# Altium PCB sensornode_v2.PcbDoc (part 2 of 2)
Units mm, origin at the board's own origin, x right, y up, seen from the top; angles counter-clockwise.
Board outline 61 x 65.5 mm, 2 copper layers (Top Layer, Bottom Layer), stack 1.6 mm thick; 116 components, 100 nets, 458 pads, 193 vias.
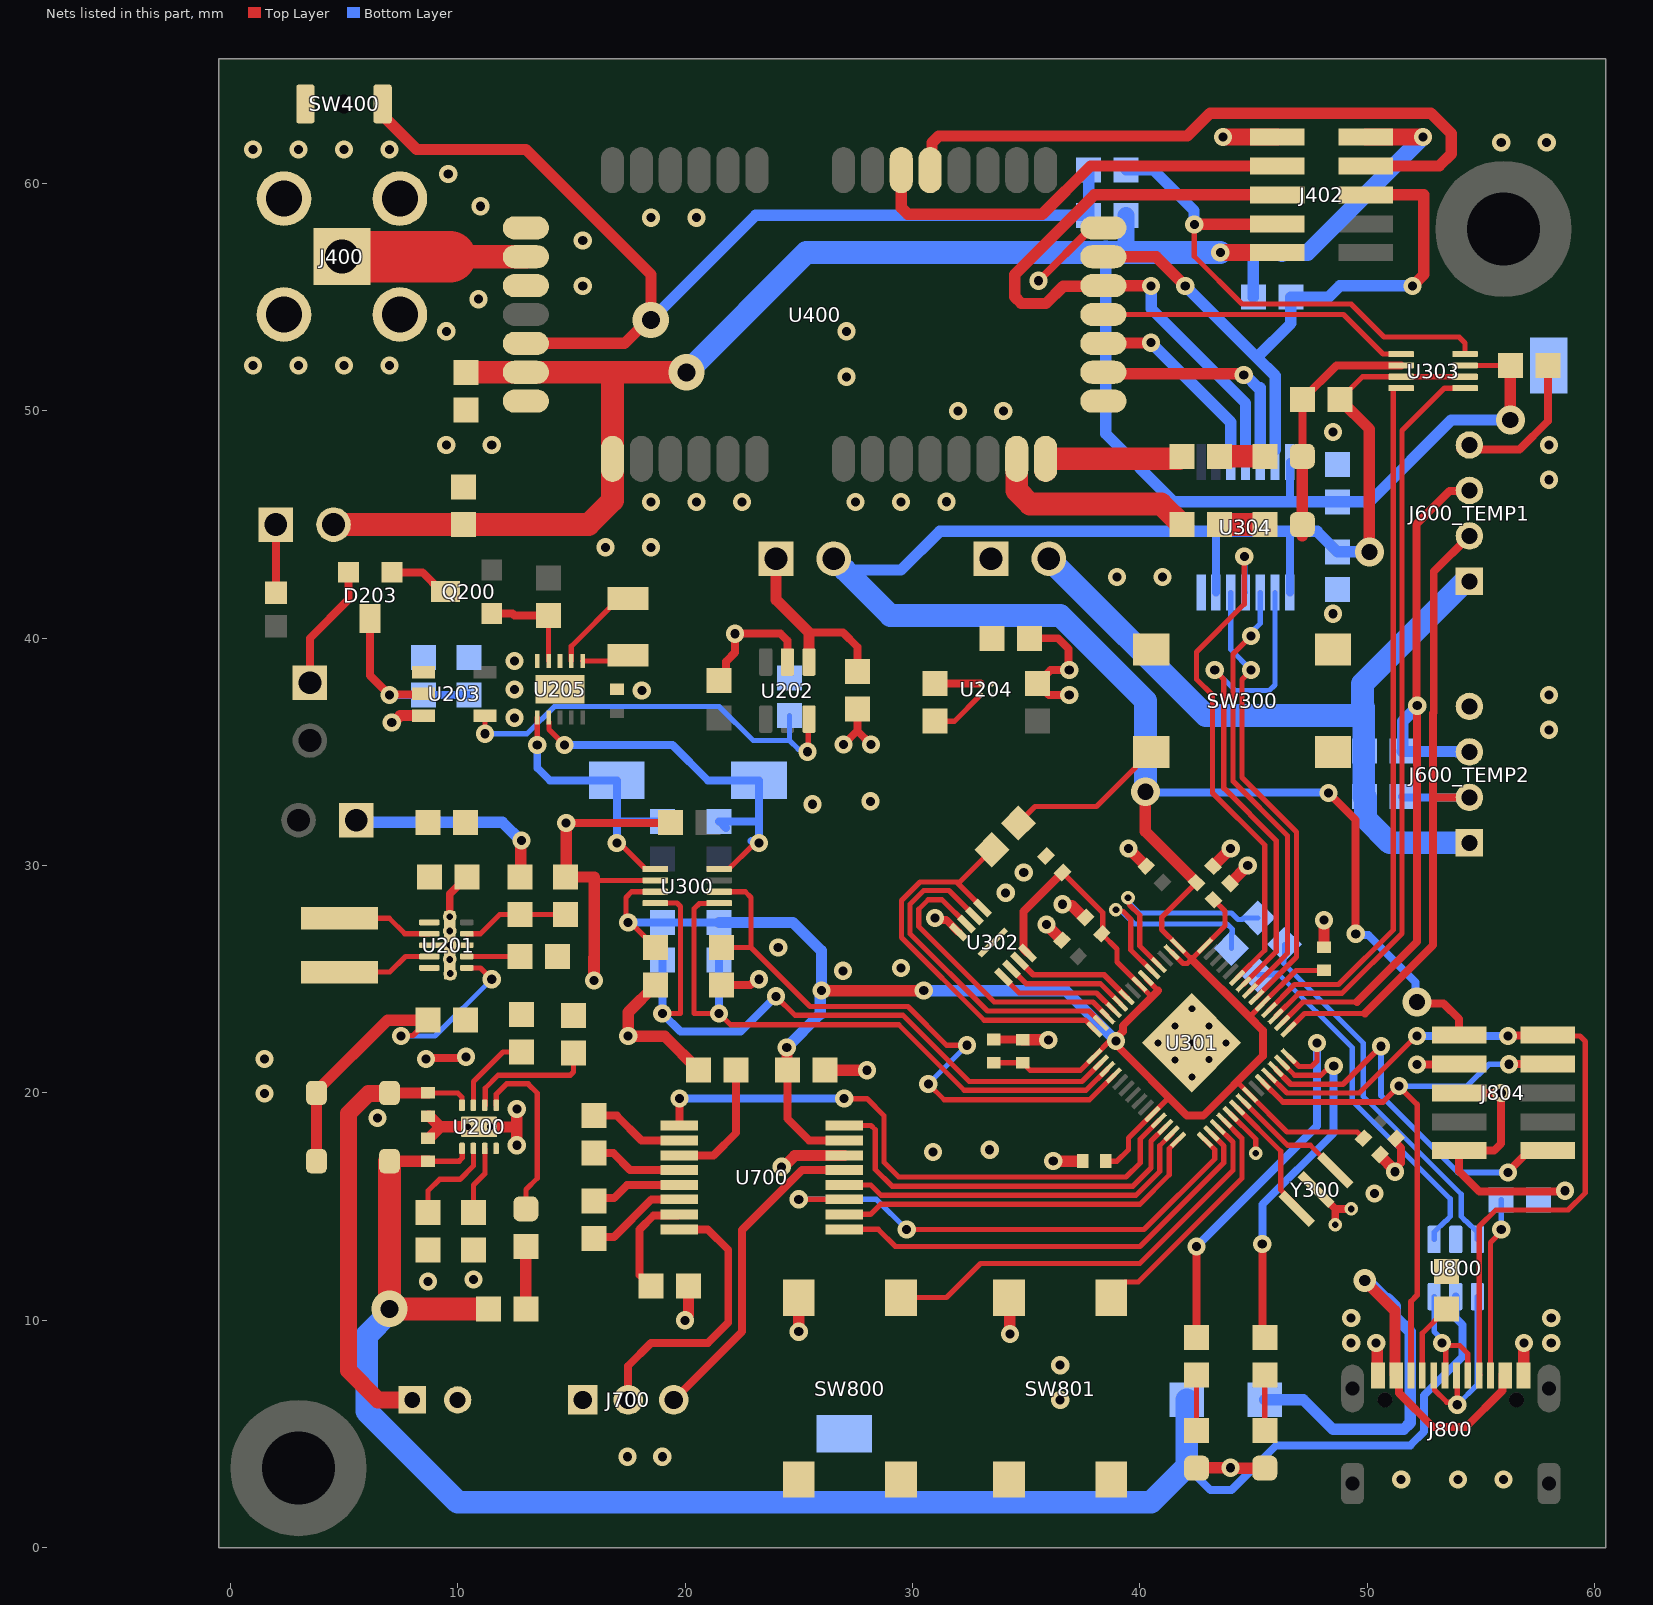
[diagram p2: the nets of this part, all layers, seen from the top]

## Via types
v1: diameter 0.8, hole 0.4, Top Layer to Bottom Layer, tented both sides, 150 vias
v2: diameter 0.6, hole 0.3, Top Layer to Bottom Layer, tented both sides, 25 vias
v3: diameter 0.8, hole 0.4, Top Layer to Bottom Layer, tented top, 10 vias
v4: diameter 1.27, hole 0.711, Top Layer to Bottom Layer, tented both sides, 4 vias
v5: diameter 1.6, hole 0.8, Top Layer to Bottom Layer, tented both sides, 3 vias
v6: diameter 1, hole 0.5, Top Layer to Bottom Layer, tented both sides, 1 vias

## Nets (pads, with @x,y where several pads share a name; then routed paths per layer and width w, separated by ;. In a path a pad name is that pad's centre, name@x,y a point inside that pad or via, vN(x,y) a via of type N, cw(c..) or ccw(c..) an arc to the next point about the centre after c; other vN are vias at no path point) (continued)
3V3-1: C300.1 C301.1 C302.1 C303.1 C304.1 C305.1 C306.1 C307.1 C308.1 C313.2 C315.2 C317.1 C701.2 J201.2 J804.1 R300.1 R301.1 U300.3 U301.1 U301.10 U301.22 U301.33 U301.42 U301.43 U301.44 U301.48 U301.49 U302.8 U303.3 U303.6 U304.1 U304.6 U700.15 | length 186.7
  Top Layer w0.23: U300.3@18.69,28.85 17.65,28.85 17.4,28.6 17.4,27.6 v1(17.5,27.5) 17.6,27.5 C317.1@18.7,26.4 ; C307.1@33.576,21.334 33.583,21.327 34.846,21.327 C308.1@34.853,21.32 35.173,21 37.393,21 U301.1@38.01,21.617 v1@38.738,22.346 ; C300.1@36.6,29.7 38.368,27.932 38.368,27.036 C302.1@38.333,27 39,26.333 39,25.767 U301.49@39.989,24.777 ; C304.1@38.5,17 39,17 39.5,17.5 39.5,18.016 U301.10@40.555,19.071 41.242,19.758 ; U301.49@39.989,24.756 40.517,24.228 ; U301.48@40.272,25.06 40.272,25.039 40.8,24.511 40.8,24.5 ; U301.44@41.404,26.192 41.899,25.696 42.089,25.696 42.183,25.79 ; C301.1@42.5,29.25 40.964,27.714 40.964,27.197 U301.43@41.686,26.474 42.277,25.884 U301.42@42.867,26.474 43.75,27.357 43.75,28 C303.1@43.25,28.5 ; 44.311,20.456 U301.22@44.847,19.92 46.48,18.287 49.567,18.287 C306.1@49.845,18.008 ; 44.822,23.338 U301.33@45.413,23.929 46.873,25.389 C305.1@48.111,25.389 ; C313.2@48.8,50.5 49.8,51.5 U303.3@51.5,51.5 U303.6@54.31,51.5
  Top Layer w0.35: C701.2@24.5,21 24.5,18.872 25.46,17.912 U700.15@27,17.912 ; U302.8@35.061,26.161 34.884,26.337 34.884,27.984 C300.1@36.6,29.7 ; v1@38.877,22.207 42.084,19 42.789,19 45.415,21.626 45.415,22.746 44.822,23.338 42.277,25.884 ; v1(38.956,22.285) 38.956,22.407 39.255,22.706 39.255,22.955 40.8,24.5 ; v1(48.3,33.2) 49.5,32 v1@49.5,26.947 ; v4(52.2,24) 52.26,23.94 53.36,23.94 54.05,23.25 J804.1@54.05,22.54
  Top Layer w0.5: v1(24.476,22) 24.488,21.988 24.488,21.012 C701.2@24.5,21 ; v1(26,24.5) v1(30.5,24.5) ; v4(40.25,33.25) 40.25,31.5 C301.1@42.5,29.25 ; C313.2@48.8,50.5 50.1,49.2 v4(50.1,43.8)
  Bottom Layer w0.35: v1(17.5,27.5) R300.1@19,27.5 R301.1@21.5,27.5 ; v4(40.25,33.25) 40.275,33.225 48.275,33.225 v1(48.3,33.2) ; U304.6@43.35,42.01 43.35,44.7 ; U304.1@46.6,42.01 46.6,44.7 ; v1(49.5,27) 49.554,26.946 50.054,26.946 52.13,24.87 52.13,24.07 v4(52.2,24)
  Bottom Layer w0.5: R301.1@21.5,27.5 24.75,27.5 26,26.25 v1(26,24.5) 25.943,24.443 25.943,23.467 v1(24.476,22) ; J201.2@27.04,43 29.5,43 31.2,44.7 43.35,44.7 46.6,44.7 47.8,44.7 C315.2@48.7,43.8 v4(50.1,43.8) ; v1(30.5,24.5) 36.741,24.5 v1(38.956,22.285)
  Bottom Layer w1: J201.2@27.04,43 29.04,41 36.5,41 40.25,37.25 v4(40.25,33.25)
3V3-1_ON: R209.1 U202.6 U203.4 | length 18.9
  Top Layer w0.23: v1(11.2,35.8) U203.4@11.2,36.6 ; v1(25.392,35.007) 25.421,35.036 25.421,36.416 U202.6@25.45,36.445
  Bottom Layer w0.23: v1(11.2,35.8) 13.052,35.8 14.252,37 21.5,37 23,35.5 24.6,35.5 ; R209.1@24.6,36.6 24.6,35.5 ; v1(25.392,35.007) 25.283,35.116 24.984,35.116 24.6,35.5
3V3-1_OUT: C207.2 J201.1 U202.1 | length 8.6
  Top Layer w0.35: 25.45,40.25 26.95,40.25 27.576,39.624 C207.2@27.576,38.529
  Top Layer w0.5: J201.1@24,43.5 24,41.7 25.45,40.25 U202.1@25.45,38.955
3V3-2: J202.2 J600_TEMP1.1 J600_TEMP2.1 R308.1 R309.1 | length 34.2
  Bottom Layer w1: J202.2@36,43.5 42.9,36.6 49.85,36.6 ; R308.1@49.85,33.034 49.85,36.6 ; R308.1@49.884,33.034 49.934,32.984 49.934,32.066 51,31 J600_TEMP2.1@54.5,31 ; J600_TEMP1.1@54.4,42.6 49.8,38 49.8,37 49.85,36.95 49.85,36.6
3V3-2_OUT: C209.2 J202.1 U204.A1
3V3_RF: C314.1 C316.1 C400.2 C401.2 J204.2 J402.2 J402.9 R400.2 R401.2 U303.7 U304.14 U400.13 U400.41 | length 108.2
  Top Layer w0.23: U303.7@54.31,52 C314.1@56.3,52
  Top Layer w0.5: v4(56.3,49.6) C314.1@56.3,52
  Top Layer w0.75: C401.2@10.36,51.69 C401.2@10.365,51.695 ; v1@43.54,56.96 J402.9@46.05,56.96 ; J402.2@49.95,62.04 v1@52.46,62.04 ; v1(52.465,62.045) v1@52.479,62.045
  Top Layer w1: J204.2@4.54,45 C400.2@10.25,45 15.75,45 16.807,46.057 16.807,47.887 U400.41@16.81,47.89 16.81,51.61 16.895,51.695 ; C401.2@10.365,51.695 16.895,51.695 ; 16.9,51.695 v5(20.065,51.695) ; 16.9,51.7 16.895,51.695
  Bottom Layer w0.35: 46.6,46 U304.14@46.6,47.75
  Bottom Layer w0.5: 38.5,56.965 38.5,49 41.5,46 46.6,46 C316.1@48.7,46 50.1,46 53.7,49.6 v4(56.3,49.6) ; R401.2@45,55 45,56.965
  Bottom Layer w0.75: R400.2@39.4,58.6 39.4,57.065 39.5,56.965 ; v1(43.545,56.965) 45,56.965 46.2,56.965 ; 46.25,56.915 46.2,56.965 ; v1(52.465,62.045) 47.385,56.965 46.2,56.965
  Bottom Layer w1: v5(20.065,51.695) 25.335,56.965 38.5,56.965 ; 38.5,57 38.5,56.965 ; v1(43.545,56.965) 39.5,56.965 38.5,56.965
3V3_VOUT: C203.2 C204.2 J200.1 R201.1 U201.6 | length 8.9
  Top Layer w0.5: R201.1@12.75,29.5 12.775,29.525 12.775,31.075 v1(12.8,31.1)
  Bottom Layer w0.5: J200.1@5.9,31.9 11.974,31.9 12.774,31.1 v1(12.8,31.1)
\ENABLE: U301.11 U700.1 | length 26.5
  Top Layer w0.23: v1(27,19.75) 28,19.75 28.75,19 28.75,16.95 29.4,16.3 39.4,16.3 40.025,16.925 40.025,17.975 U301.11@40.838,18.788
  Top Layer w0.35: U700.1@19.736,18.572 19.75,18.586 v1(19.75,19.75)
  Bottom Layer w0.35: v1(19.75,19.75) v1(27,19.75)
\FORCEOFF: U301.12 U700.16 | length 18
  Top Layer w0.23: U700.16@27,18.572 28.178,18.572 28.368,18.382 28.368,16.632 29.1,15.9 39.7,15.9 40.5,16.7 40.5,17.885 U301.12@41.121,18.505
\INVALID: U301.14 U700.10 | length 16.7
  Top Layer w0.23: U700.10@27,14.66 28.16,14.66 28.6,15.1 40,15.1 41.3,16.4 41.3,17.553 U301.14@41.686,17.94
\RF_RESET: J402.7 R402.1 U303.8 | length 23.4
  Top Layer w0.23: v1(42.4,58.2) 42.4,56.8 44.5,54.7 49.3,54.7 50.75,53.25 54.05,53.25 54.31,52.99 U303.8@54.31,52.5
  Top Layer w0.5: v1(42.4,58.2) 42.415,58.215 46.035,58.215 J402.7@46.05,58.23
  Bottom Layer w0.5: R402.1@39.4,60.6 40.6,60.6 42.387,58.813 42.387,58.213 v1(42.4,58.2)
BUTTON_1: SW800.1 U301.17 | length 19.1
  Top Layer w0.23: SW800.1@29.5,11 31.5,11 33,12.5 40,12.5 44.1,16.6 44.1,17.838 U301.17@43.433,18.505
BUTTON_2: SW801.1 U301.18 | length 10.8
  Top Layer w0.23: SW801.1@38.75,11 38.75,11.1 39.335,11.685 39.935,11.685 44.5,16.25 44.5,18.004 U301.18@43.716,18.788
CONFIG: U303.1 U400.4 | length 13.8
  Top Layer w0.23: U400.4@38.4,54.24 48.96,54.24 50.7,52.5 U303.1@51.5,52.5
FORCEON: U301.13 U700.12 | length 16.4
  Top Layer w0.23: U700.12@27,15.956 28.17,15.956 28.626,15.5 39.841,15.5 40.882,16.542 40.882,17.68 41.404,18.201 U301.13@41.404,18.223
GND: B200.2 C200.1 C201.1 C202.1 C203.1 C204.1 C205.1 C206.1 C207.1 C208.1 C209.1 C210.1 C300.2 C301.2 C302.2 C303.2 C304.2 C305.2 C306.2 C307.2 C308.2 C309.2 C310.2 C311.2 C313.1 C314.2 C315.1 C316.2 C317.2 C318.1 C400.1 C401.1 C701.1 C702.1 C703.1 D400.K D401.K D800.K D802.K J400.2 J402.1 J600_TEMP1.4 J600_TEMP2.4 J700.1 J800.A1_B12 J800.B1_A12 J804.3 J804.5 J804.9 R202.2 R203.2 R204.2 R205.2 R206.2 R207.1 R209.2 R210.1 R213.2 R305.2 R803.1 R804.1 SW300.2 SW400.1 SW800.2 SW801.2 TP202.1 TP203.1 U200.4 U200.9 U201.3 U201.8 U202.2 U203.3 U204.B1 U205.3 U205.5 U205.11 U300.2 U301.19 U301.57 U302.4 U302.9 U303.2 U304.7 U400.1 U400.7 U400.8 U400.10 U400.14 U700.14 U800.2 Y300.2 | length 125.3
  Top Layer w0.23: 16,29.35 U300.2@18.69,29.35 ; U301.19@43.999,19.071 45.1,17.97 v2(45.1,17.35)
  Top Layer w0.35: v1(8.6,21.5) 8.645,21.545 10.318,21.545 v1(10.363,21.59) ; v2(9.65,27.75) 9.65,28.75 C203.1@10.4,29.5 ; v1(14.771,31.879) 19.329,31.879 C318.1@19.35,31.9 ; C206.1@21.5,38.15 21.81,38.46 21.81,38.983 22.2,39.373 v1(22.2,40.2) 24.2,40.2 24.5,39.9 U202.2@24.5,38.955 ; R305.2@21.6,24.75 22.878,24.75 23.128,25 v1(23.25,25) ; v1(26.976,35.329) 27.576,35.929 ; C207.1@27.576,36.879 27.576,35.929 ; v1(28.176,35.329) 27.576,35.929 ; v1(31,27.7) 31.086,27.614 31.486,27.614 U302.4@32.02,27.08 ; R213.2@31,38 U204.B1@33,38 ; C307.2@33.576,22.35 33.583,22.343 34.846,22.343 C308.2@34.853,22.336 C308.2@34.857,22.332 ; C209.1@35.15,40 36.4,40 36.875,39.525 36.875,38.625 v1(36.9,38.6) 36.081,38.6 35.875,38.394 35.875,38.374 C208.1@35.501,38 ; C208.1@35.5,38 36,37.5 v1(36.9,37.5) ; v1(35.55,55.725) 35.559,55.725 37.884,58.05 U400.7@38.4,58.05 ; D400.K@47.15,47.5 C313.1@47.15,50.5 48.65,52 U303.2@51.5,52 ; Y300.2@47.751,15.753 48.6,14.904 ; v2(48.6,14.2) 48.6,14.904 ; v2(49.3,14.9) 48.604,14.9 48.6,14.904 ; v1(51.232,16.535) 51.232,16.578 51.232,16.657 51.5,16.925 51.5,17.584 51.235,17.849 51.235,17.961 C310.2@51.271,17.997 ; v1(52.194,21.25) 52.204,21.26 54.04,21.26 J804.3@54.05,21.27 ; J804.5@54.05,20 v1(55.9,20) 55.9,17.776 55.584,17.46 J804.9@54.05,17.46 54.05,16.55 54.943,15.657 58.657,15.657 v3(58.7,15.7) ; J600_TEMP1.4@54.1,48.3 56.7,48.3 57.95,49.55 C314.2@57.95,52
  Top Layer w0.5: v1(7.1,36.3) 7.181,36.3 7.481,36.6 U203.3@8.5,36.6 ; C200.1@8.7,18.016 8.751,18.016 9.225,18.49 9.225,18.51 ; C201.1@8.7,18.984 8.751,18.984 9.225,18.51 ; v1(12.6,17.7) 12.6,18.5 ; v1(12.6,19.3) 12.6,18.5 ; v1(14.771,31.879) 14.771,29.521 R202.2@14.75,29.5 16,29.5 ; 15.983,25.943 15.983,24.962 v1(16.002,24.943) ; v1@16,24.962 16,29.35 ; C317.2@18.7,24.75 17.5,23.55 v1(17.5,22.5) 19.1,22.5 C702.1@20.6,21 ; v1(20,10) 20,10.081 20.15,10.231 C703.1@20.15,11.5 ; v1(24.25,16.75) 24.331,16.75 24.832,17.251 U700.14@27,17.251 ; v1(25,9.5) SW800.2@25,11 ; C701.1@26.15,21 v1(28,21) ; SW801.2@34.25,11 34.275,10.975 34.275,9.425 v1(34.3,9.4) ; C308.2@34.857,22.332 v1@35.972,22.332 ; v1@35.9,27.4 C311.2@36.582,26.718 ; v1@36.2,17 C304.2@37.484,17 ; v1(36.6,28.3) 36.657,28.243 37.012,28.243 37.573,27.682 37.578,27.682 C302.2@37.614,27.718 ; v1(39.5,30.757) C309.2@40.282,29.976 ; D800.K@42.5,3.5 42.507,3.507 43.978,3.507 v3(43.986,3.514) ; C301.2@43.218,29.968 v1(44,30.75) ; C303.2@43.968,29.218 v1(44.75,30) ; v3@44,3.5 D802.K@45.5,3.5 ; D401.K@47.15,44.5 D401.K@47.15,45 D400.K@47.15,47.5 ; v1(48.1,27.6) 48.105,27.595 48.105,26.409 C305.2@48.111,26.405 C305.2@48.111,26.405 ; v1(50.4,9) 50.44,8.96 50.44,7.615 J800.A1_B12@50.48,7.575 ; C306.2@50.563,17.29 50.545,17.271 50.545,17.265 v1@51.232,16.578 ; J800.B1_A12@56.88,7.575 56.89,7.585 56.89,8.99 v1(56.9,9) ; 9.225,18.51 v2(10.44,18.51) U200.9@10.94,18.51 10.945,18.505 12.595,18.505 12.6,18.5
  Top Layer w0.75: v1@43.66,62.04 J402.1@46.05,62.04
  other v1: 17.473,4 19,4 36.5,6.5 36.5,8.027 49.3,9 58.1,9 49.3,10.1 58.1,10.1 8.7,11.7 10.7,11.8 50.327,15.573 36.197,17.003 30.9,17.4 33.4,17.5 6.477,18.902 1.5,19.973 1.5,21.5 35.98,22.324 24.1,26.4 35.897,27.403 34.103,28.803 34.9,29.7 25.6,32.7 28.157,32.827 58,35.973 12.5,36.5 58,37.5 18.1,37.7 12.5,37.75 12.5,39 48.499,41.077 39,42.7 41,42.7 16.5,44 18.5,44 18.5,46 20.5,46 22.5,46 27.5,46 29.5,46 31.5,46.002 58,46.973 9.5,48.5 11.5,48.5 58,48.5 48.499,49.077 32,50 34,50 27.1,51.5 1,52 3,52 5,52 7,52 9.5,53.5 27.1,53.5 10.914,54.914 15.5,55.5 15.5,57.5 18.5,58.5 20.5,58.5 11,59 9.586,60.414 1,61.5 3,61.5 5,61.5 7,61.5 55.9,61.8 57.9,61.8 43.665,62.045
  other v2: 11.44,18.51 42.3,20.7 41.55,21.45 43.05,21.475 40.8,22.2 43.8,22.2 42.277,22.207 41.55,22.95 43.05,22.95 42.3,23.7 9.675,25.25 9.65,25.875 9.65,26.5 9.65,27.125
  other v3: 51.5,3 54,3 56,3 26.943,25.373 29.5,25.5
HEADER_WAKEUP: D203.2 J203.1 | length 5.6
  Top Layer w0.35: J203.1@3.5,38.04 3.5,40 5.2,41.7 D203.2@5.2,42.9
I2C0.SCL: R303.2 TP300.1 U205.7 U300.8 | length 18
  Top Layer w0.23: U205.7@14.013,36.321 14.013,35.987 v1(14.7,35.3) ; U300.8@21.5,29.85 21.925,29.85 22.966,30.891 23.141,30.891 v1(23.25,31)
  Bottom Layer w0.35: v1(14.7,35.3) 19.45,35.3 21,33.75 TP300.1@23.25,33.75 23.25,32 ; R303.2@21.796,31.654 R303.2@21.5,31.95 23.2,31.95 23.25,32 ; v1@22.914,31.086 23.164,31.086 v1(23.25,31) 23.25,32
I2C0.SDA: R304.2 TP301.1 U205.6 U300.1 | length 12.9
  Top Layer w0.23: v1(13.5,35.3) U205.6@13.5,36.511 ; v1(17,31) 17.115,31 18.265,29.85 U300.1@18.69,29.85
  Bottom Layer w0.23: 17,32 17.05,31.95
  Bottom Layer w0.35: v1(13.5,35.3) 13.5,34.3 14.05,33.75 TP301.1@17,33.75 17,32 v1(17,31) ; 17.05,31.95 R304.2@19,31.95
I2C0_ENABLE: R305.1 U300.6 U301.4 | length 27.6
  Top Layer w0.23: U300.6@21.5,28.85 22.65,28.85 22.9,28.6 22.9,26.4 ; R305.1@21.6,26.4 22.9,26.4 ; v1(30.7,20.4) 31.4,19.7 37.79,19.7 U301.4@38.858,20.768 ; v1(32.4,22.1) 31.5,22.1 29.8,23.8 25.5,23.8 22.9,26.4
  Bottom Layer w0.23: v1(30.7,20.4) v1(32.4,22.1)
I2C0_SCL: R301.2 U300.5 U301.3 | length 28.1
  Top Layer w0.23: U300.5@21.5,28.35 21.48,28.33 20.63,28.33 20.4,28.1 20.4,23.5 v1(21.5,23.5) 22,23 29.4,23 32.282,20.118 37.642,20.118 U301.3@38.575,21.051
  Bottom Layer w0.35: v1(21.5,23.5) R301.2@21.5,25.85
I2C0_SDA: R300.2 U300.4 U301.2 | length 31.2
  Top Layer w0.23: U300.4@18.69,28.35 19.65,28.35 19.8,28.2 19.8,23.5 v1(19,23.5) ; v1(24,24.25) 24.832,23.418 29.582,23.418 32.5,20.5 37.459,20.5 U301.2@38.292,21.334
  Bottom Layer w0.35: R300.2@19,25.85 v1(19,23.5) 19.8,22.7 22.45,22.7 v1(24,24.25)
I2C1_SCL: J600_TEMP1.3 J600_TEMP2.3 R309.2 U301.30 | length 33.4
  Top Layer w0.23: U301.30@46.261,23.08 47.181,24 49.55,24
  Top Layer w0.35: 49.55,24 52.2,26.65 v1@52.2,37.006 ; v1(52.205,37.034) 52.173,37.066 52.173,45.029 53.623,46.48 54.48,46.48 J600_TEMP1.3@54.5,46.5
  Bottom Layer w0.5: R309.2@51.534,35.034 51.551,35.017 53.933,35.017 J600_TEMP2.3@53.95,35 ; R309.2@51.567,35.067 51.567,36.347 52.205,36.984 v1(52.205,37.034)
I2C1_SDA: J600_TEMP1.2 J600_TEMP2.2 R308.2 U301.29 | length 30.6
  Top Layer w0.23: U301.29@46.544,22.798 47.247,23.5 49.9,23.5
  Top Layer w0.35: 49.9,23.5 52.9,26.5 52.9,33 ; J600_TEMP2.2@53.95,33 52.9,33 ; J600_TEMP1.2@54.5,44.5 52.932,42.932 52.932,36.732 52.9,36.7 52.9,33
  Bottom Layer w0.35: R308.2@51.534,33.034 51.567,33 J600_TEMP2.2@54.5,33
LED_1: R805.2 U301.28 | length 17.5
  Top Layer w0.23: U301.28@46.544,21.617 47.001,21.16 47.56,21.16 47.8,21.399 v1(47.8,22.2)
  Top Layer w0.35: R805.2@42.5,9.254 v1(42.5,13.25)
  Bottom Layer w0.35: v1(42.5,13.25) 47.8,18.55 v1(47.8,22.2)
LED_2: R807.2 U301.27 | length 16
  Top Layer w0.23: U301.27@46.261,21.334 46.818,20.777 47.968,20.777 48.377,21.187 v1(48.532,21.187)
  Top Layer w0.35: v1(45.39,13.352) 45.39,9.364 R807.2@45.5,9.254
  Bottom Layer w0.35: v1(45.39,13.352) 45.39,15.09 48.532,18.232 v1(48.532,21.187)
NetC205_2: C205.2 D203.3 R210.2 U203.2 | length 8.7
  Top Layer w0.35: D203.3@6.14,40.868 6.14,38.36 v1(7,37.5) 7.025,37.525 8.475,37.525 U203.2@8.5,37.55
  Bottom Layer w0.35: v1(7,37.5) R210.2@8.5,37.5 C205.2@10.5,37.5
NetC700_1: C700.1 U700.4 | length 4
  Top Layer w0.35: C700.1@16,17.35 16.85,17.35 17.584,16.616 U700.4@19.736,16.616
NetC700_2: C700.2 U700.2 | length 4.2
  Top Layer w0.35: C700.2@16,19 17,19 18.088,17.912 U700.2@19.736,17.912
NetC702_2: C702.2 U700.3 | length 5.7
  Top Layer w0.35: U700.3@19.736,17.251 21.251,17.251 22.25,18.25 C702.2@22.25,21
NetC703_2: C703.2 U700.7 | length 4.7
  Top Layer w0.35: C703.2@18.5,11.5 18,12 18,13.998 18.622,14.62 19.695,14.62 U700.7@19.736,14.66
NetC704_1: C704.1 U700.6 | length 4.4
  Top Layer w0.35: C704.1@16,13.6 16.07,13.67 16.87,13.67 18.521,15.321 U700.6@19.736,15.321
NetC704_2: C704.2 U700.5 | length 4
  Top Layer w0.35: C704.2@16,15.25 16.12,15.37 16.87,15.37 17.456,15.956 U700.5@19.736,15.956
NetD201_A: D201.A R200.1 | length 2.7
  Top Layer w0.5: R200.1@13,10.5 D201.A@13,13.25
NetD201_K: D201.K U200.5 | length 8
  Top Layer w0.23: U200.5@11.7,19.45 11.7,19.95 12.15,20.4 13.1,20.4 13.5,20 13.5,16.25 13,15.75 D201.K@13,14.9
NetD400_A: D400.A R403.2 | length 2
  Top Layer w1: R403.2@43.5,48 D400.A@45.5,48
NetD401_A: D401.A R404.2 | length 2
  Top Layer w1: R404.2@43.5,45 D401.A@45.5,45
NetD800_A: D800.A R805.1 | length 2.5
  Top Layer w0.23: D800.A@42.5,5.15 R805.1@42.5,7.604
NetD802_A: D802.A R807.1 | length 2.5
  Top Layer w0.23: D802.A@45.5,5.15 R807.1@45.5,7.604
NetF800_1: F800.1 J800.A4_B9 J800.B4_A9 | length 26.5
  Top Layer w0.35: J800.A4_B9@51.28,7.575 51.405,7.45 51.405,6.808 52.913,5.3 54.343,5.3 55.955,6.912 55.955,7.53 J800.B4_A9@56.04,7.615
  Top Layer w0.5: v6(49.892,11.752) 51.23,10.414 51.23,7.625 J800.A4_B9@51.28,7.575 ; J800.B4_A9@56.04,7.615 J800.B4_A9@56.08,7.575
  Bottom Layer w0.5: F800.1@45.5,6.5 47.2,6.5 48.5,5.2 51.607,5.2 51.9,5.493 51.9,9.5 51.248,10.152 51.248,10.616 50.916,10.949 50.83,10.949 50.027,11.752 v6(49.892,11.752)
NetJ204_1: J204.1 L201.2 | length 3
  Top Layer w0.35: L201.2@2,42 J204.1@2,45
NetJ700_2: J700.2 U700.8 | length 12.4
  Top Layer w0.35: J700.2@17.5,6.5 17.5,8 18.5,9 21,9 21.9,9.9 21.9,13.1 21,14 U700.8@19.736,14
NetJ700_3: J700.3 U700.13 | length 14.3
  Top Layer w0.35: J700.3@19.5,6.5 22.5,9.5 22.5,13.971 25.145,16.616 U700.13@27,16.616
NetJ800_A5: J800.A5 R804.2 | length 3.4
  Top Layer w0.23: J800.A5@52.43,7.575 52.43,9.43 R804.2@53.5,10.5
NetJ800_B5: J800.B5 R803.2 | length 7.9
  Top Layer w0.23: J800.B5@55.43,7.575 55.43,13.416 55.9,13.886 v3(55.9,14)
  Bottom Layer w0.23: v3(55.9,14) R803.2@55.9,15.3
NetL200_1: L200.1 U201.9 | length 4.2
  Top Layer w0.23: L200.1@4.8,25.315 7.015,25.315 7.7,26 U201.9@8.75,26
NetL200_2: L200.2 U201.7 | length 4.2
  Top Layer w0.23: L200.2@4.8,27.685 6.99,27.685 7.675,27 U201.7@8.75,27
NetQ200_G: Q200.G R214.1 U205.4 | length 4.5
  Top Layer w0.23: U205.4@14,39 R214.1@14,41
  Top Layer w0.35: Q200.G@11.5,41.095 12.405,41.095 12.5,41 R214.1@14,41
NetR201_2: R201.2 R202.1 U201.4 | length 4.7
  Top Layer w0.23: U201.4@10.4,27 11,27 11.85,27.85 R201.2@12.75,27.85 R202.1@14.75,27.85
NetR203_1: R203.1 U200.7 | length 3.7
  Top Layer w0.23: U200.7@10.7,19.45 10.7,20.5 12,21.8 R203.1@12.8,21.8
NetR204_1: R204.1 U200.2 | length 4.2
  Top Layer w0.23: R204.1@8.7,14.75 8.7,15.7 9.2,16.2 10.1,16.2 10.7,16.8 U200.2@10.7,17.55
NetR205_1: R205.1 U200.6 | length 5.8
  Top Layer w0.23: U200.6@11.2,19.45 11.21,19.46 11.21,20.21 11.782,20.782 14.965,20.782 15.1,20.917 R205.1@15.1,21.75
NetR206_1: R206.1 U200.3 | length 3
  Top Layer w0.23: R206.1@10.7,14.75 10.7,15.95 11.2,16.45 U200.3@11.2,17.55
NetR310_1: R310.1 SW300.1 | length 7.2
  Top Layer w0.23: R310.1@34.667,31.867 35.4,32.6 38.1,32.6 39.815,34.315 39.815,34.415 40.4,35 SW300.1@40.5,35
NetR400_1: R400.1 R402.2 SW400.2 U400.12 | length 46.3
  Top Layer w0.5: SW400.2@6.7,63.5 6.7,63 8.2,61.5 13,61.5 18.5,56 v5(18.5,54) 18.368,54 17.338,52.97 U400.12@13,52.97
  Bottom Layer w0.5: v5(18.5,54) 23.1,58.6 R400.1@37.75,58.6 R402.2@37.75,60.6
NetR403_1: R403.1 U400.30 | length 6.5
  Top Layer w1: U400.30@35.86,47.386 U400.30@35.86,47.89 41.74,47.89 R403.1@41.85,48
NetR404_1: R404.1 U400.29 | length 9.3
  Top Layer w1: U400.29@34.59,47.89 34.59,46.496 35.176,45.91 40.94,45.91 R404.1@41.85,45
NetU205_1: U205.1 Y200.1 | length 2.1
  Top Layer w0.23: U205.1@15.5,39 17.25,39 Y200.1@17.5,39.25
NetU205_2: U205.2 Y200.2 | length 4
  Top Layer w0.23: U205.2@15,39 15,39.65 17.1,41.75 Y200.2@17.5,41.75
NetU301_20: U301.20 Y300.3 | length 5.5
  Top Layer w0.23: U301.20@44.282,19.354 46.2,17.435 46.2,15.727 46.903,15.024 Y300.3@46.903,14.904
NetU301_21: U301.21 Y300.1 | length 5.4
  Top Layer w0.23: U301.21@44.564,19.637 46.501,17.7 47.5,17.7 Y300.1@48.7,16.5
POWER_3V3-1_EN: U203.1
POWER_3V3-2_EN: R213.1 U204.B2 | length 2.5
  Top Layer w0.23: R213.1@31,36.35 31.85,36.35 U204.B2@33,37.5
POWER_3V3_PS: R207.2 U201.2 | length 2.3
  Top Layer w0.23: U201.2@10.4,26 R207.2@12.75,26
QSPI_CS_N: R310.2 U301.56 U302.1 | length 18.3
  Top Layer w0.23: U302.1@33.081,28.141 31.939,29.282 ; R310.2@33.5,30.7 32.082,29.282 31.939,29.282 ; U301.56@38.01,22.798 37.607,23.2 33.159,23.2 29.518,26.842 29.518,28.458 30.342,29.282 31.939,29.282
QSPI_SCLK: U301.52 U302.6 | length 5.4
  Top Layer w0.23: U302.6@34.354,25.454 35,24.808 38.262,24.808 U301.52@39.141,23.929
QSPI_SD0: U301.53 U302.5 | length 5.5
  Top Layer w0.23: U302.5@34,25.1 34.7,24.4 38.104,24.4 U301.53@38.858,23.646
QSPI_SD1: U301.55 U302.2 | length 14.9
  Top Layer w0.23: U302.2@32.727,27.787 31.614,28.9 30.5,28.9 29.9,28.3 29.9,27 33.3,23.6 37.773,23.6 U301.55@38.292,23.08
QSPI_SD2: U301.54 U302.3 | length 13.4
  Top Layer w0.23: U302.3@32.374,27.433 31.307,28.5 30.7,28.5 30.282,28.082 30.282,27.318 33.6,24 37.938,24 U301.54@38.575,23.363
QSPI_SD3: U301.51 U302.7 | length 5.4
  Top Layer w0.25: U302.7@34.707,25.807 35.314,25.2 38.435,25.2 U301.51@39.424,24.212
RESET: J804.10 U301.26 | length 16.9
  Top Layer w0.25: U301.26@45.979,21.051 46.645,20.385 48.942,20.385 v1(50.61,22.052)
  Top Layer w0.35: v1(56.2,16.5) 56.2,16.535 57.125,17.46 J804.10@57.95,17.46
  Bottom Layer w0.25: v1(50.61,22.052) 50.61,19.89 54,16.5 v1(56.2,16.5)
RF_Antenna: J400.1 U400.9 | length 8
  Top Layer w1.016: 9.72,56.78 U400.9@13,56.78
  Top Layer w2.28: J400.1@4.91,56.78 9.66,56.78
RF_CONFIG: U301.32 U303.4 | length 31.1
  Top Layer w0.23: U301.32@45.696,23.646 46.814,24.765 48.742,24.765 51.155,27.177 51.155,50.98 51.175,51 U303.4@51.5,51
RF_DC: J402.3 U400.20 | length 19.2
  Top Layer w0.5: U400.20@29.51,60.59 29.51,58.943 29.803,58.65 35.716,58.65 37.836,60.77 J402.3@46.05,60.77
RF_DD: J402.4 U400.19 | length 29.9
  Top Layer w0.5: U400.19@30.78,60.59 30.864,60.674 30.864,61.794 31.16,62.09 42.09,62.09 43.1,63.1 52.8,63.1 53.7,62.2 53.7,61.3 53.17,60.77 J402.4@49.95,60.77
RF_R\E\S\E\T\: U301.31 U303.5 | length 32.7
  Top Layer w0.23: U301.31@45.979,23.363 46.998,24.382 48.901,24.382 51.537,27.019 51.537,49.137 53.4,51 U303.5@54.31,51
RF_RXD: J402.5 U304.11 U400.5 | length 29.4
  Top Layer w0.5: v1(40.5,55.5) 40.495,55.505 38.405,55.505 U400.5@38.4,55.51 38.374,55.484 36.634,55.484 35.875,54.725 34.793,54.725 34.5,55.018 34.5,56 38,59.5 J402.5@46.05,59.5
  Bottom Layer w0.5: v1(40.5,55.5) 40.5,54.5 44.652,50.348 U304.11@44.652,48.285
RF_TXD: J402.6 R401.1 U304.13 U400.6 | length 28.6
  Top Layer w0.5: U400.6@38.4,56.78 40.72,56.78 v1(42,55.5) ; J402.6@49.95,59.5 52.5,59.5 52.5,56 v1(52,55.5)
  Bottom Layer w0.5: v1(42,55.5) 45.15,52.35 ; U304.13@45.957,48.285 45.957,51.543 45.15,52.35 ; v1(52,55.5) 48.8,55.5 48.3,55 R401.1@46.65,55 46.65,53.85 45.15,52.35
RTC_WakeUp: D203.1 Q200.D | length 2.7
  Top Layer w0.35: D203.1@7.105,42.9 8.45,42.9 9.29,42.06 Q200.D@9.468,42.06
SWD_CLK: J800.B8 J804.4 U301.24 | length 26.8
  Top Layer w0.25: U301.24@45.413,20.485 46.298,19.6 50.7,19.6 v1(51.4,20.3) 51.4,20.29 52.2,19.49 52.2,11.1 51.93,10.83 J800.B8@51.93,7.575
  Top Layer w0.35: v1@56.225,21.27 J804.4@57.95,21.27
  Bottom Layer w0.25: v1(51.4,20.3) 54.4,20.3 55.361,21.261 v1(56.237,21.261)
SWDIO: J800.A8 J804.2 U301.25 | length 33.9
  Top Layer w0.23: U301.25@45.696,20.768 46.472,19.992 49.655,19.992 52.162,22.5 v3(52.2,22.5) ; J800.A8@54.965,7.61 54.93,7.645 54.93,14.13 55.656,14.856 58.844,14.856 59.6,15.612 59.6,22.26 59.36,22.5 58.855,22.5 J804.2@58.815,22.54
  Top Layer w0.35: v3(56.2,22.5) 56.22,22.52 57.93,22.52 J804.2@57.95,22.54 57.99,22.5 J804.2@58.815,22.5
  Bottom Layer w0.35: v3(52.2,22.5) v3(56.2,22.5)
UART0_RXD: U301.16 U700.9 | length 20.1
  Top Layer w0.23: U700.9@27,14 28.5,14 29.25,13.25 40.016,13.25 43.7,16.934 43.7,17.673 U301.16@43.15,18.223
UART0_TXD: U301.15 U700.11 | length 23.2
  Top Layer w0.23: v1(25,15.321) U700.11@27,15.321 ; v1(29.75,13.993) 40.193,13.993 43.3,17.1 43.3,17.507 U301.15@42.867,17.94
  Bottom Layer w0.23: v1(25,15.321) 28.422,15.321 v1(29.75,13.993)
UART1.CTS: U304.10 U400.3 | length 8.8
  Top Layer w0.5: U400.3@38.4,52.97 38.415,52.985 40.485,52.985 v1(40.5,53)
  Bottom Layer w0.5: v1(40.5,53) 44,49.5 U304.10@44,47.75
UART1.RTS: U304.12 U400.2 | length 10.5
  Top Layer w0.5: U400.2@38.4,51.7 38.469,51.631 44.516,51.631 v1(44.573,51.573)
  Bottom Layer w0.5: v1(44.573,51.573) 44.654,51.573 45.214,51.014 45.305,51.014 45.305,47.755 U304.12@45.3,47.75
UART1_CTS: U301.34 U304.5 | length 20.1
  Top Layer w0.23: v1(44.9,38.6) 44.9,38.58 44.5,38.18 44.5,33.88 46.9,31.48 46.9,25.982 U301.34@45.13,24.212
  Bottom Layer w0.23: U304.5@44,42.01 44,40.4 44,39.5 v1(44.9,38.6)
UART1_RTS: U301.35 U304.3 | length 19.7
  Top Layer w0.23: U301.35@44.847,24.495 46.5,26.147 46.5,31.314 44.1,33.714 44.1,39.3 v1(44.9,40.1)
  Bottom Layer w0.23: v1(44.9,40.1) 44.9,40.254 45.3,40.654 U304.3@45.3,42.01
UART1_RXD: U301.37 U304.4 | length 22.8
  Top Layer w0.23: U301.37@44.282,25.06 45.5,26.279 45.5,30.9 43.2,33.2 43.2,37.5 42.5,38.2 42.5,39.4 44.6,41.5 v1(44.6,43.6)
  Bottom Layer w0.23: v1(44.6,43.6) 44.625,43.575 44.625,42.035 U304.4@44.65,42.01
UART1_TXD: U301.36 U304.2 | length 22.7
  Top Layer w0.23: v1(43.3,38.6) 43.3,38.58 43.7,38.18 43.7,33.407 46,31.107 46,26.213 U301.36@44.564,24.777
  Bottom Layer w0.23: v1(43.3,38.6) 44.2,37.7 45.7,37.7 45.95,37.95 U304.2@45.95,42.01
USB_D+: J800.A6 J800.B6 U800.6 | length 5.9
  Top Layer w0.23: v1(53.298,9) 53.333,8.965 v1@53.465,8.965 ; J800.A6@53.43,7.575 53.465,7.61 v1@53.465,8.965 ; J800.B6@54.43,7.575 54.43,8.535 54.074,8.891 53.609,8.891 53.5,9 v1@53.465,8.965
  Bottom Layer w0.23: U800.6@52.95,11.045 52.95,9.502 53.298,9.154 v1(53.298,9)
USB_D-: J800.A7 J800.B7 U800.4 | length 8.4
  Top Layer w0.23: J800.B7@52.93,7.575 52.965,7.54 52.965,6.937 53.508,6.394 53.856,6.394 v1(53.965,6.285) 53.965,7.54 J800.A7@53.93,7.575
  Bottom Layer w0.23: v1(53.965,6.285) 54.85,7.17 U800.4@54.85,11.045
USB_D_N: R307.2 U800.3 | length 16.5
  Bottom Layer w0.23: R307.2@46.367,26.533 46.367,25.918 46.333,25.884 46.333,25.694 49.833,22.194 49.833,19.852 54.142,15.542 54.142,14.562 54.334,14.37 54.35,14.37 54.85,13.87 U800.3@54.85,13.555
USB_D_P: R306.2 U800.1 | length 16.1
  Bottom Layer w0.23: R306.2@45.2,25.2 45.815,25.2 45.883,25.268 46.074,25.268 49.349,21.994 49.349,19.651 53.658,15.342 53.658,14.562 53.466,14.37 53.45,14.37 52.95,13.87 U800.1@52.95,13.555
USB_N: R307.1 U301.46 | length 9.4
  Top Layer w0.23: 39.554,28.267 40,27.821 40,26.464 U301.46@40.838,25.626
  Bottom Layer w0.23: v2(39.484,28.587) 39.554,28.516 39.554,28.326 39.966,27.915 43.44,27.915 43.446,27.92 44.038,27.92 44.326,27.632 44.517,27.632 44.585,27.7 R307.1@45.2,27.7
USB_P: R306.1 U301.47 | length 9.5
  Top Layer w0.23: 39.272,27.984 39.6,27.656 39.6,26.298 U301.47@40.555,25.343
  Bottom Layer w0.23: v2(38.952,28.055) 39.022,27.984 39.212,27.984 39.766,27.431 43.641,27.431 43.647,27.436 43.837,27.436 44.067,27.206 44.067,27.016 44.033,26.982 R306.1@44.033,26.367
V_BAT: B200.1 C201.2 D202.A U200.8 | length 20.4
  Top Layer w0.23: C201.2@8.7,20 10,20 10.19,19.81 U200.8@10.19,19.46 U200.8@10.2,19.45
  Top Layer w0.5: D202.A@7,20 C201.2@8.7,20
  Top Layer w0.75: D202.A@7,20 6.976,19.976 6.076,19.976 5.2,19.1 5.2,7.8 6.5,6.5 B200.1@8,6.5
V_SUPPLY: C202.2 D200.K D202.K U201.1 U201.10 | length 17.1
  Top Layer w0.23: v1(7.5,22.5) 7.531,22.531 8.031,22.531 C202.2@8.7,23.2 ; U201.1@10.4,25.5 11,25.5 v1(11.5,25)
  Top Layer w0.5: D200.K@3.79,17 D202.K@3.79,20 3.79,20.08 6.91,23.2 C202.2@8.7,23.2
  Bottom Layer w0.23: v1(7.5,22.5) 9,22.5 v1(11.5,25)
V_USB: C200.2 D200.A F800.2 R200.2 U200.1 U800.5 | length 79.4
  Top Layer w0.23: C200.2@8.7,17 10.065,17 10.2,17.135 U200.1@10.2,17.55
  Top Layer w0.5: D200.A@7,17 C200.2@8.7,17
  Top Layer w1: D200.A@7,17 v5(7,10.5) R200.2@11.35,10.5
  Bottom Layer w0.35: 42.071,3.571 43.107,2.535 44.035,2.535 46,4.5 51.9,4.5 52.5,5.1 52.5,6.7 54.2,8.4 54.2,9.8 53.9,10.1 U800.5@53.9,11.045
  Bottom Layer w1: v5(7,10.5) 7,10.338 6,9.338 6,6 10,2 40.5,2 42.071,3.571 F800.2@42.071,6.5
pads on no net: J402.8 J402.10 J800. J800.SH1 J800.SH2 J800.SH3 J800.SH4 J804.6 J804.7 J804.8 SW400.H1 U201.5 U202.3 U205.8 U205.9 U301.5 U301.6 U301.7 U301.8 U301.9 U301.38 U301.39 U301.40 U301.41 U304.8 U304.9 U400.11 U400.15 U400.16 U400.17 U400.18 U400.21 U400.22 U400.23 U400.24 U400.25 U400.26 U400.27 U400.28 U400.31 U400.32 U400.33 U400.34 U400.35 U400.36 U400.37 U400.38 U400.39 U400.40 U400.42

## Polygon pours and split planes (outlines as drawn)
GND on Top Layer "GND_T" (solid, remove dead copper, pour order 33): 0,65 0,0.5 60,0.5 60,65
3V3 on Top Layer "3V3_POWER_1" (solid, pour order 29): 21.3,37.7 27.4,37.7 27.4,34 21.3,34
3V3-2_OUT on Top Layer "3V3-2_POWER_T" (solid, pour order 32): 31.5,44.5 35.5,44.5 35.5,37.7 31.5,37.7
3V3 on Top Layer "3V3_POWER_2" (solid, pour order 30): 30.3,37.7 36.4,37.7 36.4,34 30.3,34
3V3-1_OUT on Top Layer "3V3-1_POWER_T" (solid, pour order 31): 22.5,45 29,45 29,37.7 22.5,37.7
3V3_VOUT on Top Layer "3V3_VOUT" (solid, pour order 19): 4.5,30.5 4.474,32.974 4.5,33 9.5,33 9.5,26.5 4.5,26.5
V_SUPPLY on Top Layer "V_SUPPLY_POWER_T" (solid, pour order 18): 3,26.5 9.5,26.5 9.5,20.5 3,20.5
GND on Bottom Layer "GND_B" (solid, remove dead copper, pour order 26): 0,65 0,0.5 60,0.5 60,65

## Other copper
Top Layer:
  region net RF_Antenna: 9.61,57.915 10.61,57.915 11.71,57.29 11.71,56.29 10.61,55.665 9.61,55.665

## Silkscreen, mask and mechanical layers (free items; w line width, h text height)
Top Overlay:
  drawing of 27 lines, arcs and shapes, not listed
  text "RESET" at 7.754,62.754 h1.02
  text "v2.0" at 30.1,62.621 h2
  text "Sensornode" at 14.9,62.531 h3
  text "RF PROG." at 43.654,54.954 h1.02
  text "RADIO" at 2.754,49.254 h1.2
  text "TEMP1" at 52.246,40.754 h1.2 r90
  text "3V3-1" at 21.496,39.754 h1.2 r90
  text "3V3-2" at 30.996,39.754 h1.2 r90
  text "CONTROL" at 5.254,33.954 h1.2
  text "TEMP2" at 52.105,29.587 h1.2 r90
  text "DEBUG" at 53.254,24.454 h1.2
  text "3V3" at 2.246,24.254 h1.2 r90
  text "e" at 30.982,12.235 h5
  text "CHARGE" at 2.246,10.754 h1.2 r90
  text "RS232" at 16.754,8.254 h1.2
Top Solder:
  text "MSE" at 24,27.126 h2.5
Mechanical 15:
  the board outline again, w0.4

## Text inside footprints (layer, text, board x,y; h text height)
J800: Mechanical 13 "PCB EDGE" at 59.08,0.32 h0.41